# Altium PCB PCB_COMB-ATOM-RELAY.PcbDoc
Units mm, origin at the board's own origin, x right, y up, seen from the top; angles counter-clockwise.
Board outline 75.31 x 50.27 mm, 2 copper layers (Top Layer, Bottom Layer); 30 components, 23 nets, 78 pads, 6 vias.
Unrouted connection lines stored in the file: 5.
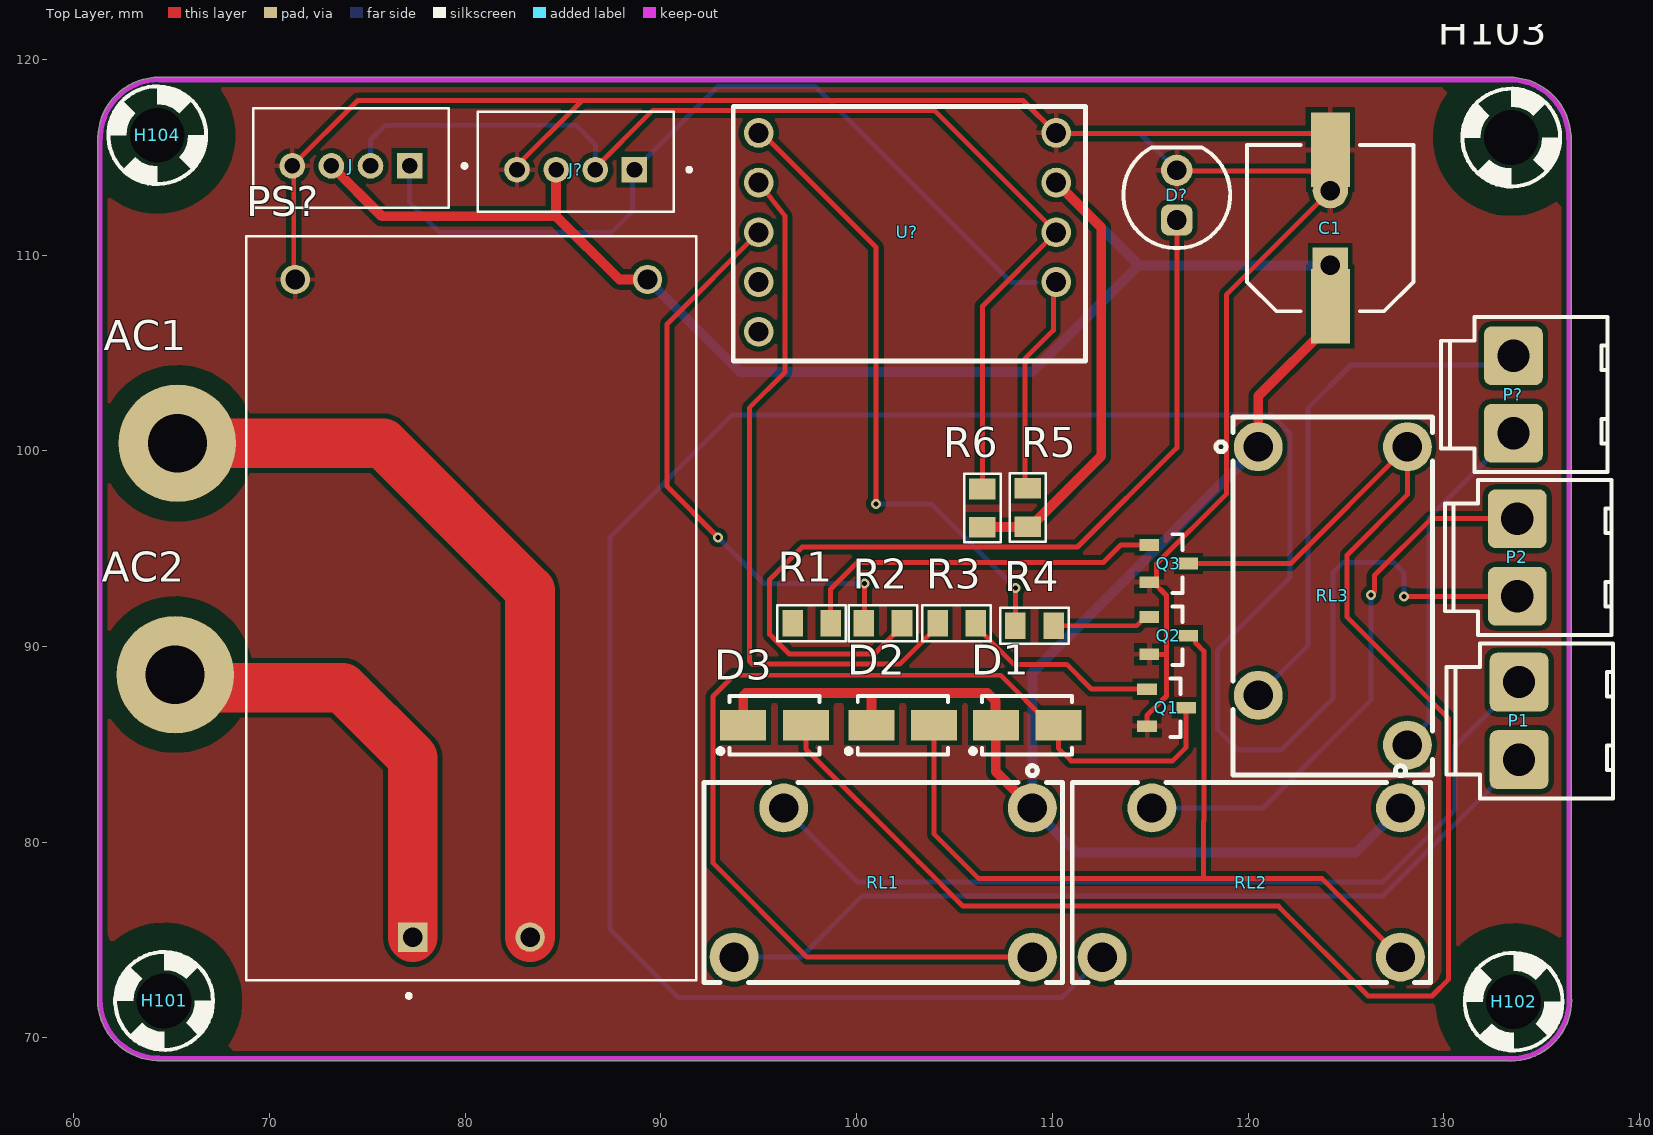
[diagram p0: Top Layer view]
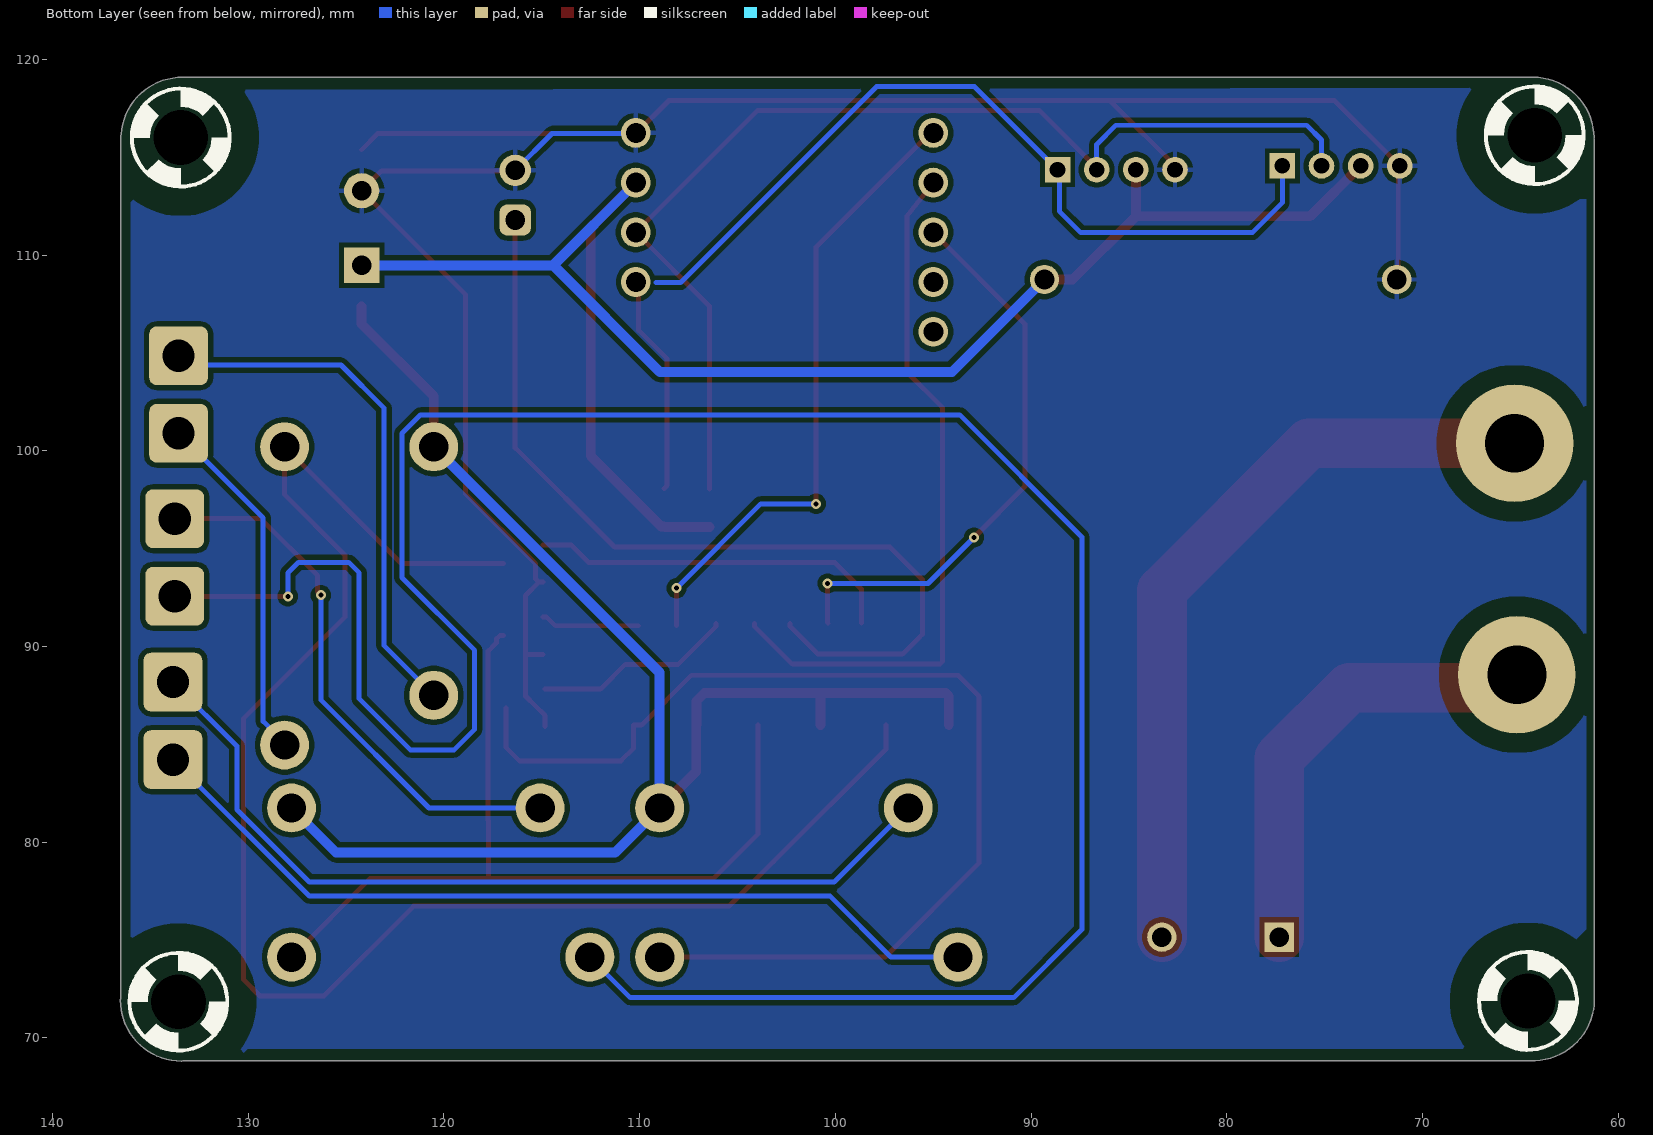
[diagram p1: Bottom Layer view, seen from below]
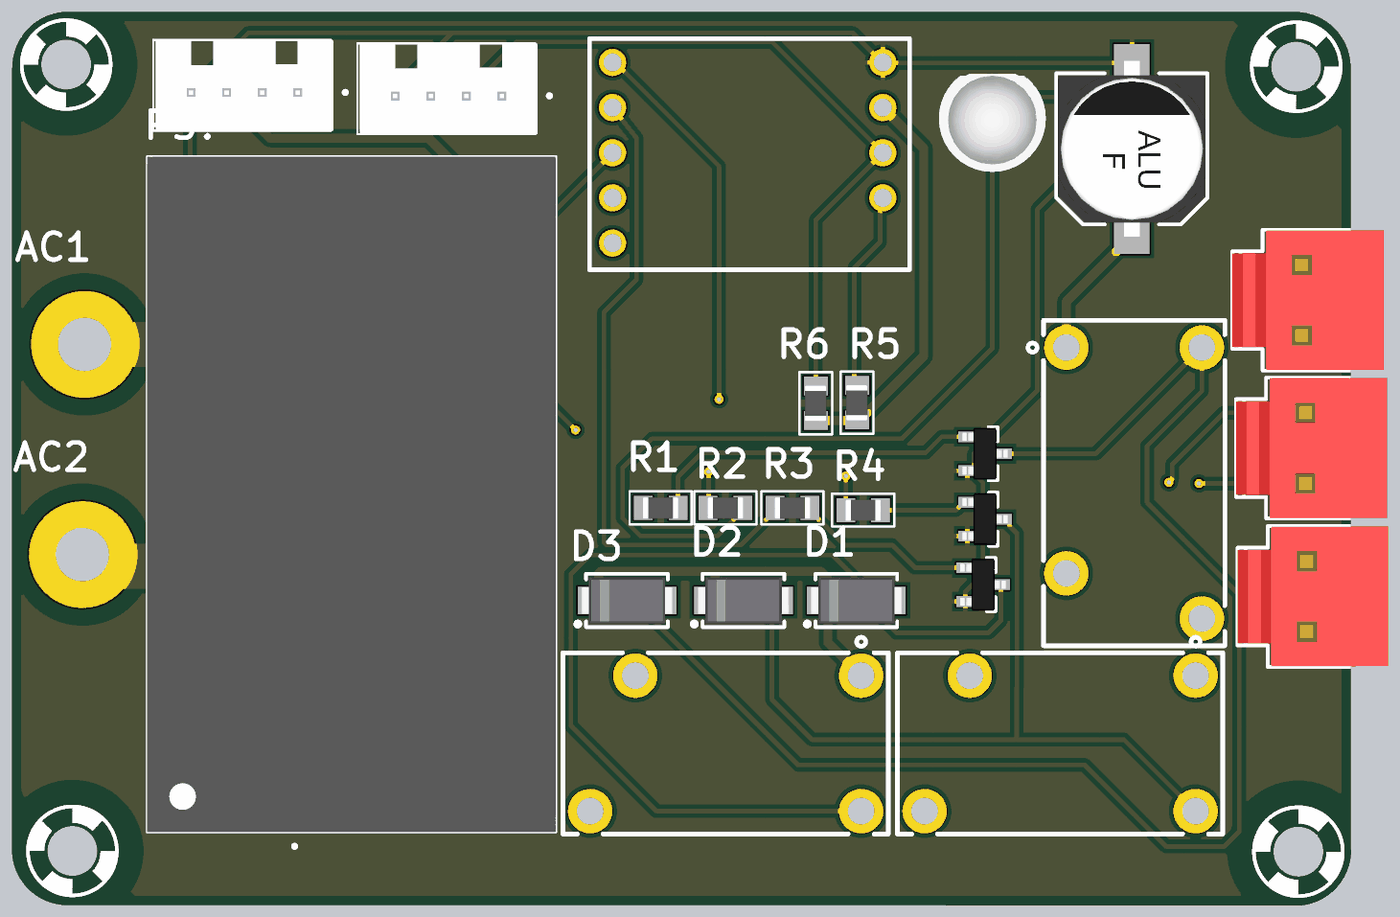
[diagram p2: 3D render of the assembled board from above, using the file's embedded part models]

## Layer stack, top to bottom
Top Solder: solder mask 0.0102, Solder Resist, Dk 3.5
Top Layer: signal copper 0.0356
Dielectric 1: dielectric 0.32, FR-4, Dk 4.8
Bottom Layer: signal copper 0.0356
Bottom Solder: solder mask 0.0102, Solder Resist, Dk 3.5

## Board outline
64.257,68.844 cw(c64.35,71.97) 61.223,71.97 61.224,71.986 61.224,115.921 61.243,115.988 cw(c64.37,115.96) 64.37,119.087 64.409,119.081 133.536,119.081 133.588,119.07 cw(c133.38,115.95) 136.5,116.164 136.517,116.1 136.517,72.009 136.537,71.94 cw(c133.41,71.94) 133.41,68.813 133.341,68.833

## Design rules (kind name [scope] priority, off if disabled: settings)
Clearance [All] p1: gap=0.254 ignorepadtopadclearanceinfootprint=FALSE except(0: Arc-Hole Track-Hole SMDPad-Hole THPad-Hole Via-Hole Fill-Hole Poly-Hole Region-Hole Text-Hole)
PolygonConnect [All] p1: connectstyle=Relief reliefconductorwidth=0.254 reliefentries=4 polygonreliefangle="90 Angle" airgapwidth=0.254
RoutingVias [All] p1: holewidth=0.711 width=1.27 viastyle="Through Hole" minholewidth=0.711 minwidth=1.27 maxholewidth=0.711 maxwidth=1.27
SolderMaskExpansion [All] p1: expansion=0.102 istentingtop=FALSE
Width [All] p1: maxlimit=2.54 minlimit=0.254 preferedwidth=0.254 minimp=50.000000 maximp=50.000000 favimp=50.000000
30 further rules are at their usual default settings.

## Components (designator, comment, footprint, x,y, rotation, side; value= is the part's Value field where it differs from the comment)
AC1 "Screw Hole" SCREW/3.0/6.0 65.3,100.38 r90 top (schematic designator H?)
AC2 "Screw Hole" SCREW/3.0/6.0 65.18,88.56 r90 top (schematic designator H101)
C1 "220uF" "C SMD ALU (F) DUAL" 124.206,111.379 r90 top
D1 "" "DO-214AC (SMA)" 108.712,85.979 r180 top
D2 "D4" "DO-214AC (SMA)" 102.362,85.979 r180 top
D3 "D4" "DO-214AC (SMA)" 95.809,85.979 r180 top
D? "Led" "LED 5MM - GREEN" 116.36,113.06 r90 top
H101 "Screw Hole" SCREW/2.8/5.0 64.62,71.89 r0 top
H102 "Screw Hole" SCREW/2.8/5.0 133.57,71.85 r0 top
H103 "Screw Hole" SCREW/2.8/5.0 133.45,116 r0 top
H104 "Screw Hole" SCREW/2.8/5.0 64.27,116.12 r0 top
J "110990030" SEEED_110990030 74.168,114.554 r180 top
J? "110990030" SEEED_110990030 85.65,114.36 r180 top
P1 "Header 2" HDR/Header/2/VH 133.85,86.2 r270 top
P2 "Header 2" HDR/Header/2/VH 133.76,94.55 r270 top
P? "Header 2" HDR/Header/2/VH 133.56,102.87 r270 top
PS? "HLK-5M05" CONV_HLK-5M05 80.32,91.95 r90 top
Q1 "Transistor NPN" SOT-23 115.84,86.868 r0 top
Q2 "Transistor NPN" SOT-23 115.951,90.551 r0 top
Q3 "Transistor NPN" SOT-23 115.951,94.234 r0 top
R1 "R" "R 0805" 97.704,91.186 r0 top
R2 "R" "R 0805" 101.346,91.186 r0 top
R3 "R" "R 0805" 105.115,91.186 r0 top
R4 "R" "R 0805" 109.093,91.059 r0 top
R5 "R" "R 0805" 108.75,97.1 r270 top
R6 "R" "R 0805" 106.43,97.07 r270 top
RL1 "Relay_932_SH_AH" RELAY932 102.188,90.065 r180 top
RL2 "Relay_932_SH_AH" RELAY932 120.998,90.065 r180 top
RL3 "Relay_932_SH_AH" RELAY932 112.208,93.411 r270 top
U? "AtomIC" SPGA48x11 119.2,111.08 r180 top

## Footprints (in the part's own frame and the unit in brackets; to place one, negate y for a bottom-side part, rotate by r counter-clockwise, add the part's x,y. Pads: shape width x height; smd on the part's side, far side on the other; paste and mask are expansions set on the pad)
"C SMD ALU (F) DUAL" [mm] "SMD Aluminum Electrolytic Capacitor, size F (8.0 x 10.2 mm)"
  rect 3.81x2 smd: 1(-4,0) 2(4,0)
  rect 1.8x1.8 hole 1: 1(-1.905,0)
  round 1.8 hole 1: 2(1.905,0)
  silkscreen extent -4.25,-4.25 4.25,4.25, body extent -4.95,-4.15 4.95,4.15, height 10.2
CONV_HLK-5M05 [mm]
  round 1.5 hole 1: 1(-16.8,-3) 3(16.8,9) 4(16.8,-9)
  rect 1.5x1.5 / inner round 1.5 / far side rect 1.5x1.5 hole 1: 1(-16.8,3)
  silkscreen extent -19.9,-11.5 19,11.5, body extent -19,-11.5 19,11.5, height 18
"DO-214AC (SMA)" [mm] "Molded Diode, 2-Leads, Body 4.3x2.7mm, IPC Medium Density"
  rect 2.35x1.55 smd: 1(-1.6,0) 2(1.6,0)
  silkscreen extent -2.3,-1.5 2.89,1.5, body extent -2.6,-1.3 2.6,1.3, height 2.4
HDR/Header/2/VH [mm]
  rrect25% 3x3 hole 1.65: 1(-1.98,0) 2(1.98,0)
  silkscreen extent -3.96,-3.7 3.96,4.8, body extent -3.93,-3.7 3.93,4.8, height 10.6
"LED 5MM - GREEN" [mm]
  rrect50% 1.6x1.6 hole 1: 1(-1.27,0)
  round 1.6 hole 1: 2(1.27,0)
  silkscreen extent -2.71,-2.73 2.44,2.73, body extent -2.98,-3.01 2.44,3.01, height 8.63
"R 0805" [mm] "Chip Resistor, 2-Leads, Body 2.0x1.3mm, IPC Medium Density"
  rect 1.05x1.35 smd: 1(-0.975,0) 2(0.975,0)
  silkscreen extent -1.75,-0.92 1.75,0.92, body extent -1,-0.61 1,0.59, height 0.5
RELAY932 [mm]
  round 2.5 hole 1.5 paste+0 mask+0.051: 1(-6.792,8.315) 2(5.908,8.315) 3(8.448,15.935) 4(-6.792,15.935)
  silkscreen extent -8.32,6.16 9.98,17.22, body extent -8.26,6.98 10.03,17.27, height 18.4
SCREW/2.8/5.0 [mm]
  round 0 hole 2.8 unplated: 1(0,0)
  Top Layer pour cut-out: -4,0 -3.696,1.531 -2.828,2.828 -1.531,3.695 0,4 0,4 1.531,3.695 2.828,2.828 3.695,1.531 4,0 4,0 3.696,-1.531 2.828,-2.828 1.531,-3.696 0,-4 0,-4 -1.531,-3.696 -2.828,-2.828 -3.696,-1.531 -4,0
  Bottom Layer pour cut-out: -4,0 -3.696,1.531 -2.828,2.828 -1.531,3.695 0,4 0,4 1.531,3.695 2.828,2.828 3.695,1.531 4,0 4,0 3.696,-1.531 2.828,-2.828 1.531,-3.696 0,-4 0,-4 -1.531,-3.696 -2.828,-2.828 -3.696,-1.531 -4,0
  silkscreen extent -2.5,-2.5 2.5,2.5
SCREW/3.0/6.0 [mm]
  round 6 hole 3: 1(0,0)
  Top Layer pour cut-out: -4,0 -3.696,1.531 -2.828,2.828 -1.531,3.695 0,4 0,4 1.531,3.695 2.828,2.828 3.695,1.531 4,0 4,0 3.696,-1.531 2.828,-2.828 1.531,-3.696 0,-4 0,-4 -1.531,-3.696 -2.828,-2.828 -3.696,-1.531 -4,0
  Bottom Layer pour cut-out: -4,0 -3.696,1.531 -2.828,2.828 -1.531,3.695 0,4 0,4 1.531,3.695 2.828,2.828 3.695,1.531 4,0 4,0 3.696,-1.531 2.828,-2.828 1.531,-3.696 0,-4 0,-4 -1.531,-3.696 -2.828,-2.828 -3.696,-1.531 -4,0
SEEED_110990030 [mm]
  rect 1.308x1.308 hole 0.8: 1(-3,0)
  round 1.308 hole 0.8: 2(-1,0) 3(1,0) 4(3,0)
  silkscreen extent -5.9,-2.95 5,2.15, body extent -5.13,-2.94 4.87,2.16, height 8.1
SOT-23 [mm] "SOT23, 3-Leads, Body 3.0x2.5mm (max), Pitch 0.95mm, IPC Medium Density"
  rect 1x0.6 smd: 1(-1,0.95) 2(-1,-0.95) 3(1,0)
  silkscreen extent 0.2,-1.5 0.7,1.5, body extent -1.28,-1.46 1.27,1.46, height 0.95
SPGA48x11 [mm]
  round 1.524 hole 1.02: 1(9,2.46) 2(9,-0.08) 3(9,-2.62) 4(9,-5.16) 5(24.2,5) 6(24.2,2.46) 7(24.2,-0.08) 8(24.2,-2.62) 9(24.2,-5.16)
  silkscreen extent 7.5,-6.5 25.5,6.5

## Part data
C1: library part Capacitor, "Capacitor pol"
D1 D2 D3: library part Diode, "Default Diode"
D?: "Typical LED"
J J?: "GROVE 2MM 4PIN VERT CONN 10PCS", PACKAGE=None, Arrow_Electronics-Purchase-URL=https://snapeda.com/shop?store=Arrow+Electronics&id=583576, Availability=Good, MF="Seeed Technology", Mouser-Purchase-URL=https://snapeda.com/shop?store=Mouser&id=583576, MP=110990030, Price=None, SnapEDA_Link=https://www.snapeda.com/parts/110990030/Seeed%20Technology%20Co.,%20Ltd/view-part/583576/?ref=snap
  J: Check_prices=https://www.snapedacom/parts/110990030/Seeed%20Technology%20Co.,%20Ltd/view-part/583576/?ref=eda
  J?: Check_prices=https://www.snapeda.com/parts/110990030/Seeed%20Technology%20Co.,%20Ltd/view-part/583576/?ref=eda
P1 P2 P?: "Header, 2-Pin"
PS?: "AC DC 220V to 5V 5W 5Watt Isolated Switching Step-Down Power Supply Module Converter", PACKAGE=Package, Availability="Not in stock", Check_prices=https://www.snapeda.com/parts/HLK-5M05/Hi-link/view-part/?ref=eda, MF=Hi-link, MP=HLK-5M05, Price=None, SnapEDA_Link=https://www.snapeda.com/parts/HLK-5M05/Hi-link/view-part/?ref=snap
Q1 Q2 Q3: "NPN Bipolar Transistor"
R1 R2 R3 R4 R5 R6: library part Resistor, "Resistor"
AC1 AC2 H101 H102 H103 H104: TYPE=NO-BOM, UNIT PRICE=0

## Via types
v1: diameter 0.508, hole 0.254, Top Layer to Bottom Layer, 6 vias

## Nets (pads, with @x,y where several pads share a name; then routed paths per layer and width w, separated by ;. In a path a pad name is that pad's centre, name@x,y a point inside that pad or via, vN(x,y) a via of type N, cw(c..) or ccw(c..) an arc to the next point about the centre after c; other vN are vias at no path point)
+5: C1.1 D1.2 D2.2 D3.2 J.3 J?.3 PS?.4 R5.2 R6.2 RL1.1 RL2.1 RL3.1 U?.3 | length 163.7
  Top Layer w0.508: J.3 75.742,111.98 84.65,111.98 ; J?.3 84.65,111.98 ; PS?.4 87.88,108.75 84.65,111.98 ; D3.2 94.209,87.473 94.358,87.622 100.762,87.622 ; D2.2 100.762,87.622 ; R6.2 108.72,96.095 R5.2 108.9,96.125 112.5,99.725 112.5,111.4 U?.3 ; RL1.1 107.112,83.618 D1.2 107.092,85.999 107.092,87.218 106.688,87.622 100.762,87.622 ; RL3.1 120.523,102.791 124.206,106.474 C1.1@124.206,107.379
  Bottom Layer w0.508: PS?.4 94.04,104.03 108.972,104.03 114.416,109.474 ; U?.3@110.166,113.724 114.416,109.474 ; RL3.1 108.98,88.66 RL1.1 111.25,79.48 125.52,79.48 RL2.1 ; C1.1@124.206,109.474 114.416,109.474
AC1: AC2.1 PS?.1@77.32,75.15 | length 23.1
  Top Layer w2.54: AC2.1 65.842,87.898 73.732,87.898 77.32,84.31 PS?.1@77.32,75.15
AC2: AC1.1 PS?.1@83.32,75.15 | length 38.8
  Top Layer w2.54: AC1.1 75.8,100.38 83.32,92.86 PS?.1@83.32,75.15
G19/RX: D?.1 R2.2 | length 46.1
  Top Layer w0.254: R2.2 102.321,91.036 100.893,89.608 96.572,89.608 96.05,90.13 96.046,90.13 95.823,90.353 95.823,90.357 95.56,90.62 95.56,93.42 97.22,95.08 111.29,95.08 116.36,100.15 D?.1@116.36,111.9
G21/SCL: J.1 J?.1 R5.1 U?.1 | length 54.4
  Top Layer w0.254: R5.1 108.6,98.225 108.6,104.7 110.05,106.15 U?.1@110.05,108.891
  Bottom Layer w0.254: J.1 77.168,112.672 78.7,111.14 87.46,111.14 88.56,112.24 88.56,113.833 88.726,113.999 J?.1@89.011,113.999 ; J?.1 92.9,118.61 97.89,118.61 107.915,108.585 109.18,108.585
G22/TX: Q3.1 R1.2 | length 19
  Top Layer w0.254: R1.2 98.679,92.936 100.033,94.29 112.61,94.29 113.504,95.184 Q3.1
G23/NEC: Q1.1 R3.2 | length 10.2
  Top Layer w0.254: R3.2 106.09,91.036 108.036,89.09 110.73,89.09 112.002,87.818 Q1.1
G25/SDA: J.2 J?.2 R6.1 U?.2 | length 56.8
  Top Layer w0.254: J?.2@86.544,114.344 89.59,117.39 103.97,117.39 U?.2 106.43,107.39 R6.1
  Bottom Layer w0.254: J.2 75.168,115.878 75.92,116.63 85.67,116.63 86.654,115.646 86.654,114.706 J?.2@86.79,114.57
G33/ADC: Q2.1 R4.2 | length 5.1
  Top Layer w0.254: R4.2 114.309,91.059 114.751,91.501 Q2.1
Gnd: C1.2 D?.2 J.4 J?.4 PS?.3 Q1.2 Q2.2 Q3.2 U?.4 | length 114.8
  Top Layer w0.254: PS?.3 71.244,108.826 71.244,114.478 J.4 74.512,117.898 85.978,117.898 ; J?.4@82.462,114.382 85.978,117.898 ; Q1.2 114.84,86.479 115.34,86.98 115.832,87.471 115.832,89.601 ; Q2.2 115.832,89.601 ; Q3.2 115.151,93.284 115.324,93.457 115.324,94.218 118.892,97.786 118.892,107.97 124.206,113.284 123.19,114.3 D?.2@116.36,114.3 ; Q3.2@115.153,93.282 115.832,92.603 115.832,89.601 ; C1.2@124.206,115.379 123.38,116.205 110.2,116.205 108.507,117.898 85.978,117.898
  Bottom Layer w0.254: U?.4@110.2,116.205 114.485,116.205 D?.2 D?.2@116.667,114.023
NetP1_1: P1.1 RL1.2 | length 45.3
  Bottom Layer w0.254: RL1.2 100.06,77.97 126.882,77.97 130.576,81.664 130.576,84.906 P1.1
NetP1_2: P1.2 RL1.3 | length 44.3
  Bottom Layer w0.254: RL1.3 97.16,74.13 100.27,77.24 126.87,77.24 P1.2
NetP2_1: P2.1 RL2.2 | length 28.4
  Top Layer w0.254: v1(126.29,92.62) 126.466,92.796 126.466,93.636 129.36,96.53 P2.1
  Bottom Layer w0.254: RL2.2 120.768,81.75 126.29,87.272 v1(126.29,92.62)
NetP2_2: P2.2 RL2.3 | length 126.8
  Top Layer w0.254: v1(127.98,92.56) 133.75,92.56 P2.2
  Bottom Layer w0.254: RL2.3 110.48,72.06 90.89,72.06 87.41,75.54 87.41,95.591 93.653,101.834 121.199,101.834 122.154,100.879 122.154,93.524 118.43,89.8 118.43,85.77 119.5,84.7 121.7,84.7 124.33,87.33 124.33,93.76 124.87,94.3 127.435,94.3 127.98,93.755 v1(127.98,92.56)
NetP?_1: P?.1 RL3.2 | length 27.3
  Bottom Layer w0.254: RL3.2 123.06,90.04 123.06,102.18 125.26,104.38 133.09,104.38 P?.1
NetP?_2: P?.2 RL3.3 | length 18.2
  Bottom Layer w0.254: RL3.3 128.143,85.084 129.236,86.177 129.236,96.566 P?.2
NetR1_1: R1.1 U?.6
NetR2_1: R2.1 U?.7 | length 29.3
  Top Layer w0.254: v1(92.92,95.57) 90.32,98.17 90.32,106.48 95.102,111.262 U?.7@95.102,111.297 ; R2.1 100.4,91.215 v1(100.4,93.22)
  Bottom Layer w0.254: v1(92.92,95.57) 95.27,93.22 v1(100.4,93.22)
NetR3_1: R3.1 U?.8 | length 36.3
  Top Layer w0.254: U?.8 96.34,111.996 96.34,104.01 94.52,102.19 94.52,89.249 94.669,89.1 102.204,89.1 104.14,91.036 R3.1
NetR4_1: R4.1 U?.9 | length 32
  Top Layer w0.254: U?.9@95.308,116.082 100.99,110.4 v1(100.99,97.29) ; R4.1 108.12,91.061 v1(108.12,92.98)
  Bottom Layer w0.254: v1(100.99,97.29) 103.81,97.29 v1(108.12,92.98)
RL1: D1.1 Q1.3 RL1.4 | length 56.3
  Top Layer w0.254: RL1.4 97.47,74.13 92.653,78.947 92.653,87.443 93.74,88.53 107.361,88.53 109.912,85.979 D1.1 110.312,84.808 110.96,84.16 116.15,84.16 116.84,84.85 Q1.3
RL2: D2.1 Q2.3 RL2.4 | length 44.8
  Top Layer w0.254: D2.1 103.962,80.408 106.22,78.15 117.73,78.15 ; Q2.3 117.151,90.551 117.324,90.378 117.324,90.178 117.74,89.762 117.74,81.1 117.73,81.09 117.73,78.15 ; RL2.4 123.77,78.15 117.73,78.15
RL3: D3.1 Q3.3 RL3.4 | length 83.9
  Top Layer w0.254: D3.1 97.409,84.761 103.174,78.996 105.44,76.73 121.55,76.73 126.14,72.14 129.4,72.14 130.25,72.99 130.25,86.31 125.064,91.496 125.064,94.673 128.143,97.752 RL3.4 122.174,94.234 Q3.3
pads on no net: H101.1 H102.1 H103.1 H104.1 U?.5

## Polygon pours and split planes (outlines as drawn)
Gnd on Top Layer "GND_L01_P000" (solid, pour order 0): 61.35,112.2 cw(c68.079,112.231) 68.11,118.96 129.5,118.96 136.42,112.04 136.42,74.7 130.61,68.89 68.62,68.89 67.335,70.175 cw(c68.674,77.213) 61.51,77.18
Gnd on Bottom Layer "GND_L02_P001" (solid, pour order 1): 130.277,118.435 136.005,112.707 136.005,75.023 136.003,75.023 130.23,69.25 130.025,69.455 67.745,69.455 61.64,75.56 61.64,112.85 62.106,112.85 67.603,118.347 67.443,118.507 67.443,118.555

## Keep-outs
Top Layer:
  lines w0.254: 61.35,71.97 ccw(c64.35,71.97) 64.35,68.97 ; 61.351,71.919 61.351,115.921 ; 61.37,115.96 cw(c64.37,115.96) 64.37,118.96 ; 64.31,68.96 133.51,68.96 ; 64.384,118.954 133.536,118.954 ; 133.38,118.95 cw(c133.38,115.95) 136.38,115.95 ; 133.41,68.94 ccw(c133.41,71.94) 136.41,71.94 ; 136.39,71.84 136.39,116.1